# EAGLE board Operant-Front-Bonsai (EAGLE 9.6.2)
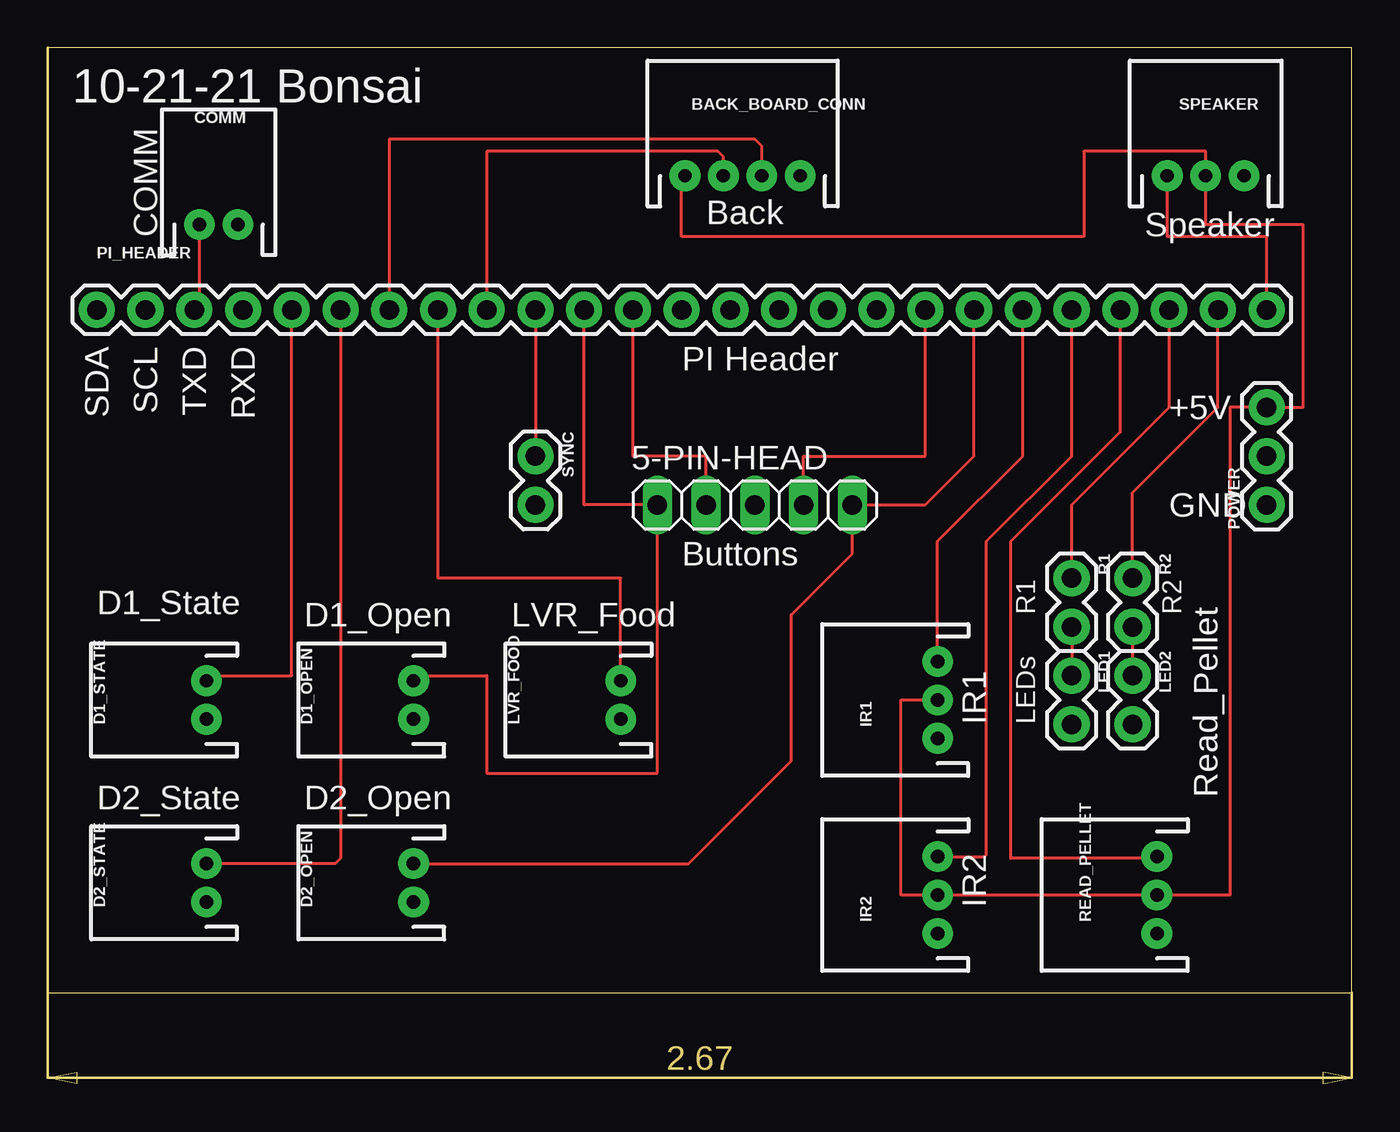
[diagram p0: board, top side]
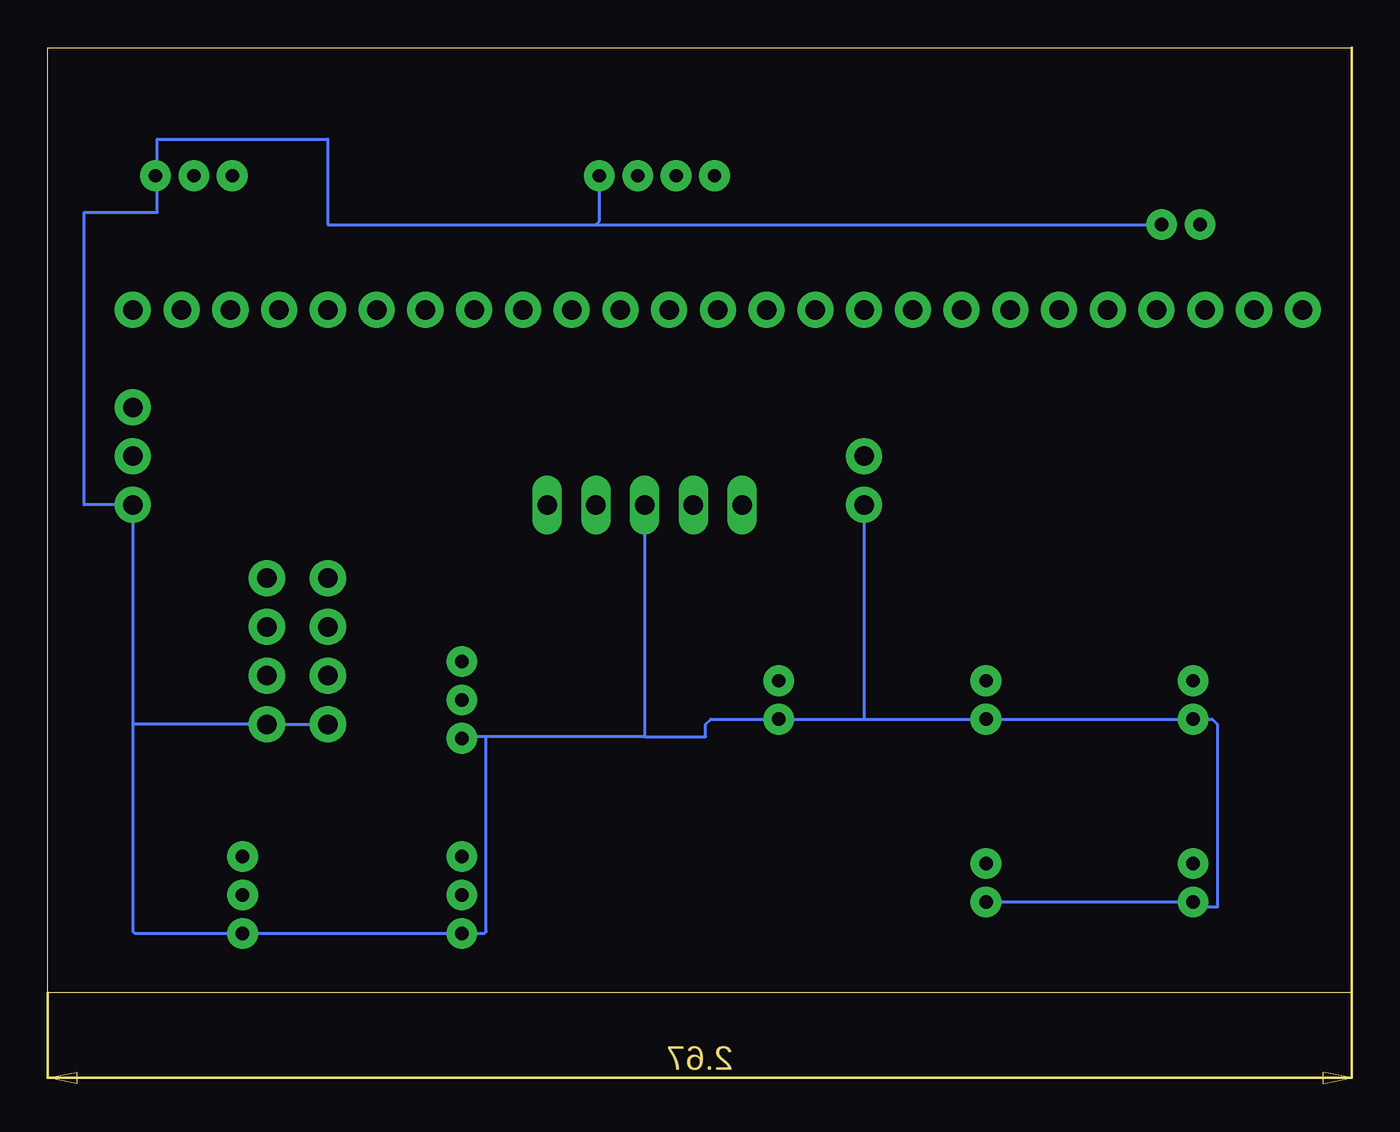
[diagram p1: board, bottom side, seen from below]

Size 67.92 x 49.2 mm. Coordinates in mm from the lower left corner, seen from the top.
Outline: 0,0 67.92,0 67.92,49.2 0,49.2 0,0
Copper layers (1*16): Top 0.035mm / dielectric 1.5mm / Bottom 0.035mm
Design rules "default": minimum track width 6mil, minimum drill 0.35mm, track to track 6mil, track to pad 6mil, pad to pad 6mil, via to via 6mil, smd to smd 6mil, copper to edge 40mil, drill to drill 6mil, minimum pad ring 10mil, minimum via ring 8mil, stop-mask expansion 4mil, vias tented up to drill 0mil, thermal gap 10mil

## Footprints (pad centres in the part's own frame; a part is rotated, then mirrored left to right if it is on the bottom)
1X05 = drill 1.016 long: 1 -5.08,0; 2 -2.54,0; 3 0,0; 4 2.54,0; 5 5.08,0
JST-4-PTH = drill 0.7 pad 1.6: 1 -3,0; 2 -1,0; 3 1,0; 4 3,0
JST-2-PTH = drill 0.7 pad 1.6: 1 -1,0; 2 1,0
JST-3-PTH = drill 0.7 pad 1.6: 1 -2,0; 2 0,0; 3 2,0
1X02 = drill 1.016 pad 1.88: 1 0,0; 2 2.54,0
1X25 = drill 1.016 pad 1.88: 1 0,0; 2 2.54,0; 3 5.08,0; 4 7.62,0; 5 10.16,0; 6 12.7,0; 7 15.24,0; 8 17.78,0; 9 20.32,0; 10 22.86,0; 11 25.4,0; 12 27.94,0; 13 30.48,0; 14 33.02,0; 15 35.56,0; 16 38.1,0; 17 40.64,0; 18 43.18,0; 19 45.72,0; 20 48.26,0; 21 50.8,0; 22 53.34,0; 23 55.88,0; 24 58.42,0; 25 60.96,0
1X03 = drill 1.016 pad 1.88: 1 0,0; 2 2.54,0; 3 5.08,0

## Placement (x,y rotation side)
5-PIN-HEAD  [1X05]  36.83,25.4 0 top
BACK_BOARD_CONN  [JST-4-PTH]  36.2,42.55 0 top
COMM  [JST-2-PTH]  8.89,40.01 0 top
D1_OPEN  [JST-2-PTH]  19.05,15.24 90 top
D1_STATE  [JST-2-PTH]  8.26,15.24 90 top
D2_OPEN  [JST-2-PTH]  19.05,5.71 90 top
D2_STATE  [JST-2-PTH]  8.26,5.71 90 top
IR1  [JST-3-PTH]  46.35,15.24 90 top
IR2  [JST-3-PTH]  46.35,5.08 90 top
LED1  [1X02]  53.34,16.51 270 top
LED2  [1X02]  56.52,16.51 270 top
LVR_FOOD  [JST-2-PTH]  29.84,15.24 90 top
PI_HEADER  [1X25]  2.54,35.56 0 top
POWER  [1X03]  63.5,25.4 90 top
R1  [1X02]  53.34,21.59 270 top
R2  [1X02]  56.52,21.59 270 top
READ_PELLET  [JST-3-PTH]  57.78,5.08 90 top
SPEAKER  [JST-3-PTH]  60.33,42.55 0 top
SYNC  [1X02]  25.4,27.94 270 top

## Library data of the parts
5-PIN-HEAD = pinhead
BACK_BOARD_CONN = SparkFun-Connectors; PROD_ID: WIRE-13531; SF_ID: PRT-09916
COMM D1_OPEN D1_STATE D2_OPEN D2_STATE LVR_FOOD = SparkFun-Connectors; PROD_ID: CONN-09863; SKU: PRT-09914
IR1 IR2 READ_PELLET SPEAKER = SparkFun-Connectors; PROD_ID: WIRE-10037; SF_ID: PRT-09915
LED1 LED2 PI_HEADER R1 R2 SYNC = SparkFun-Connectors
POWER = SparkFun-Connectors; PROD_ID: XXX-00000

## Nets
+5V: BACK_BOARD_CONN.1 IR1.2 IR2.2 POWER.3 READ_PELLET.2 SPEAKER.2
CONN1: LED1.1 R1.2
CONN2: LED2.1 R2.2
GND: 5-PIN-HEAD.3 BACK_BOARD_CONN.4 COMM.2 D1_OPEN.1 D1_STATE.1 D2_OPEN.1 D2_STATE.1 IR1.1 IR2.1 LED1.2 LED2.2 LVR_FOOD.1 POWER.1 READ_PELLET.1 SPEAKER.3 SYNC.2
GPIO4: D1_STATE.2 PI_HEADER.5
GPIO5: 5-PIN-HEAD.4 PI_HEADER.18
GPIO6: 5-PIN-HEAD.5 D2_OPEN.2 PI_HEADER.19
GPIO12: IR1.3 PI_HEADER.20
GPIO13: IR2.3 PI_HEADER.21
GPIO16: PI_HEADER.22 READ_PELLET.3
GPIO17: D2_STATE.2 PI_HEADER.6
GPIO18: BACK_BOARD_CONN.3 PI_HEADER.7
GPIO19: PI_HEADER.23 R1.1
GPIO20: PI_HEADER.24 R2.1
GPIO21: PI_HEADER.25 SPEAKER.1
GPIO22: BACK_BOARD_CONN.2 PI_HEADER.9
GPIO23: PI_HEADER.10 SYNC.1
GPIO24: 5-PIN-HEAD.1 D1_OPEN.2 PI_HEADER.11
GPIO25: 5-PIN-HEAD.2 PI_HEADER.12
GPIO27: LVR_FOOD.2 PI_HEADER.8
RXD: PI_HEADER.4
SCL: PI_HEADER.2
SDA: PI_HEADER.1
SPI_CE0: PI_HEADER.16
SPI_CE1: PI_HEADER.17
SPI_MISO: PI_HEADER.14
SPI_MOSI: PI_HEADER.13
SPI_SCLK: PI_HEADER.15
TXD: COMM.1 PI_HEADER.3

## Tracks (layer width: path | path; a pad name or v marks a point on that pad's centre or on a via)
+5V
  Top 0.152: IR1.2 44.45,15.24 44.45,5.08 IR2.2 READ_PELLET.2 61.59,5.08 61.59,30.48 POWER.3 65.41,30.48 65.41,40.01 60.33,40.01 SPEAKER.2 60.33,43.81 53.98,43.81 53.98,39.37 33.02,39.37 33.02,42.37 BACK_BOARD_CONN.1
CONN1
  Top 0.152: R1.2 LED1.1
CONN2
  Top 0.152: R2.2 LED2.1
GND
  Bottom 0.152: 45.09,13.34 45.09,3.17 45.18,3.08 IR2.1 READ_PELLET.1 63.41,3.08 63.5,3.17 63.5,13.97 | 45.09,13.34 46.26,13.34 IR1.1 | 5-PIN-HEAD.3 36.83,13.34 | 36.83,13.34 45.09,13.34 | 36.83,13.34 33.66,13.34 33.66,13.97 33.38,14.24 LVR_FOOD.1 25.4,14.24 | 25.4,14.24 D1_OPEN.1 D1_STATE.1 7.25,14.24 6.99,13.97 6.99,4.45 7.99,4.45 D2_STATE.1 D2_OPEN.1 | 39.37,40.01 53.34,40.01 53.34,44.45 62.23,44.45 62.23,42.64 SPEAKER.3 62.23,42.45 62.23,40.64 66.04,40.64 66.04,25.4 POWER.1 63.5,13.97 | 39.37,40.01 39.2,40.18 BACK_BOARD_CONN.4 | 39.37,40.01 COMM.2 | SYNC.2 25.4,14.24 | 63.5,13.97 LED2.2 LED1.2
GPIO4
  Top 0.152: D1_STATE.2 8.53,16.51 12.7,16.51 PI_HEADER.5
GPIO5
  Top 0.152: 5-PIN-HEAD.4 39.37,27.94 45.72,27.94 PI_HEADER.18
GPIO6
  Top 0.152: PI_HEADER.19 48.26,27.94 45.72,25.4 5-PIN-HEAD.5 41.91,22.86 38.73,19.68 38.73,12.06 33.38,6.71 D2_OPEN.2
GPIO12
  Top 0.152: PI_HEADER.20 50.8,27.94 46.35,23.5 IR1.3
GPIO13
  Top 0.152: IR2.3 48.8,7.08 48.9,7.17 48.9,23.5 53.34,27.94 PI_HEADER.21
GPIO16
  Top 0.152: READ_PELLET.3 57.69,6.99 50.16,6.99 50.16,23.5 55.88,29.21 PI_HEADER.22
GPIO17
  Top 0.152: PI_HEADER.6 15.24,6.99 14.97,6.71 D2_STATE.2
GPIO18
  Top 0.152: BACK_BOARD_CONN.3 37.2,44.09 36.83,44.45 17.78,44.45 PI_HEADER.7
GPIO19
  Top 0.152: PI_HEADER.23 58.42,30.48 53.34,25.4 R1.1
GPIO20
  Top 0.152: PI_HEADER.24 60.96,30.48 56.52,26.04 R2.1
GPIO21
  Top 0.152: PI_HEADER.25 63.5,39.37 58.33,39.37 SPEAKER.1
GPIO22
  Top 0.152: BACK_BOARD_CONN.2 35.2,43.55 34.92,43.81 22.86,43.81 PI_HEADER.9
GPIO23
  Top 0.152: PI_HEADER.10 SYNC.1
GPIO24
  Top 0.152: PI_HEADER.11 27.94,25.4 5-PIN-HEAD.1 31.75,11.43 22.86,11.43 22.86,16.51 19.32,16.51 D1_OPEN.2
GPIO25
  Top 0.152: 5-PIN-HEAD.2 34.29,27.94 30.48,27.94 PI_HEADER.12
GPIO27
  Top 0.152: LVR_FOOD.2 29.84,21.59 20.32,21.59 PI_HEADER.8
TXD
  Top 0.152: COMM.1 7.89,35.83 PI_HEADER.3

## Text on the board
tPlace: 10-21-21 Bonsai | Back | COMM | Speaker | SDA | SCL | TXD | RXD | PI Header | +5V | GND | Buttons | D1_State | R1 | R2 | D1_Open | LVR_Food | IR1 | LEDs | D2_State | D2_Open | Read_Pellet | IR2